# EAGLE board EEPROM Programmer (EAGLE 7.6.0)

Size 56.03 x 56.03 mm. Coordinates in mm from the lower left corner, seen from the top.
Outline: 4.03,0.03 0.03,0.03 0.03,3.03
Outline: 24.03,0.03 33.03,0.03
Outline: 52.03,0.03 40.03,0.03
Outline: 0.03,42.03 0.03,52.03
Outline: 0.03,3.03 arc90 3.03,0.03 4.03,0.03
Outline: 4.03,0.03 33.03,0.03
Outline: 52.03,0.03 arc90 56.03,3.03 56.03,52.03 arc90 52.03,56.03 3.03,56.03 arc90 0.03,52.03
Outline: 52.03,0.03 33.03,0.03
Outline: 0.03,3.03 0.03,52.03
Copper layers (1*16): Top 0.035mm / dielectric 1.5mm / Bottom 0.035mm
Design rules "default": minimum track width 10mil, minimum drill 24mil, track to track 8mil, track to pad 8mil, pad to pad 8mil, via to via 8mil, smd to smd 8mil, copper to edge 40mil, drill to drill 8mil, minimum pad ring 10mil, minimum via ring 8mil, stop-mask expansion 4mil, vias tented up to drill 0mil, thermal gap 10mil

## Footprints (pad centres in the part's own frame; a part is rotated, then mirrored left to right if it is on the bottom)
DIL24-6 = drill 0.813 long: 1 -13.97,-7.62; 2 -11.43,-7.62; 3 -8.89,-7.62; 4 -6.35,-7.62; 5 -3.81,-7.62; 6 -1.27,-7.62; 7 1.27,-7.62; 8 3.81,-7.62; 9 6.35,-7.62; 10 8.89,-7.62; 11 11.43,-7.62; 12 13.97,-7.62; 13 13.97,7.62; 14 11.43,7.62; 15 8.89,7.62; 16 6.35,7.62; 17 3.81,7.62; 18 1.27,7.62; 19 -1.27,7.62; 20 -3.81,7.62; 21 -6.35,7.62; 22 -8.89,7.62; 23 -11.43,7.62; 24 -13.97,7.62
1X02 = drill 1.016 long: 1 -1.27,0; 2 1.27,0
1X10-BIG = drill 1.016 pad 1.778 octagon: 1 -11.43,0; 2 -8.89,0; 3 -6.35,0; 4 -3.81,0; 5 -1.27,0; 6 1.27,0; 7 3.81,0; 8 6.35,0; 9 8.89,0; 10 11.43,0
1X15 = drill 1.016 long: 1 -17.78,0; 2 -15.24,0; 3 -12.7,0; 4 -10.16,0; 5 -7.62,0; 6 -5.08,0; 7 -2.54,0; 8 0,0; 9 2.54,0; 10 5.08,0; 11 7.62,0; 12 10.16,0; 13 12.7,0; 14 15.24,0; 15 17.78,0
1206 = smd 1.6 x 1.803: A -1.422,0; C 1.422,0
R1206 = smd 1.6 x 1.803: 1 -1.422,0; 2 1.422,0
DIL16 = drill 0.813 long: 1 -8.89,-3.81; 2 -6.35,-3.81; 3 -3.81,-3.81; 4 -1.27,-3.81; 5 1.27,-3.81; 6 3.81,-3.81; 7 6.35,-3.81; 8 8.89,-3.81; 9 8.89,3.81; 10 6.35,3.81; 11 3.81,3.81; 12 1.27,3.81; 13 -1.27,3.81; 14 -3.81,3.81; 15 -6.35,3.81; 16 -8.89,3.81

## Placement (x,y rotation side)
28C16AP  28C16AP  [DIL24-6]  38.53,15.53 0 top
CAP  [1X02]  9.03,53.03 0 top
EEPROM_ADDR  PINHD-1X10  [1X10-BIG]  39.53,54.33 180 top
EEPROM_DATA  PINHD-1X10  [1X10-BIG]  40.63,2.03 0 top
JP_D13_VCC_GND  [1X15]  17.03,20.53 270 top
JP_DC11_DC10  [1X15]  2.03,20.53 270 top
POWER_LED  [1206]  14.03,48.03 0 top
R_POWER_LED  [R1206]  24.03,46.03 180 top
R_WRITE_EN_LED  [R1206]  24.53,42.03 180 top
R_WRITE_EN_PU  [R1206]  24.53,38.03 180 top
SR_0  74HC595N  [DIL16]  43.03,42.03 180 top
SR_1  74HC595N  [DIL16]  43.03,31.03 180 top
WRITE_EN_LED  [1206]  52.03,48.53 0 top

## Library data of the parts
28C16AP = microchip; MPN: CAT28C16ALI-12; OC_FARNELL: 1718292; OC_NEWARK: 06R0648
CAP = pinhead
EEPROM_ADDR EEPROM_DATA JP_D13_VCC_GND JP_DC11_DC10 POWER_LED R_POWER_LED R_WRITE_EN_LED R_WRITE_EN_PU WRITE_EN_LED = adafruit
SR_0 SR_1 = 74xx-eu

## Nets
A0: JP_D13_VCC_GND.12
A1: JP_D13_VCC_GND.11
A2: JP_D13_VCC_GND.10
A3: JP_D13_VCC_GND.9
A4: JP_D13_VCC_GND.8
A5: JP_D13_VCC_GND.7
A6: JP_D13_VCC_GND.6
A7: JP_D13_VCC_GND.5
EEPROM_A0: 28C16AP.8 EEPROM_ADDR.1 SR_0.15
EEPROM_A1: 28C16AP.7 EEPROM_ADDR.2 SR_0.1
EEPROM_A2: 28C16AP.6 EEPROM_ADDR.3 SR_0.2
EEPROM_A3: 28C16AP.5 EEPROM_ADDR.4 SR_0.3
EEPROM_A4: 28C16AP.4 EEPROM_ADDR.5 SR_0.4
EEPROM_A5: 28C16AP.3 EEPROM_ADDR.6 SR_0.5
EEPROM_A6: 28C16AP.2 EEPROM_ADDR.7 SR_0.6
EEPROM_A7: 28C16AP.1 EEPROM_ADDR.8 SR_0.7
EEPROM_A8: 28C16AP.23 SR_1.15
EEPROM_A9: 28C16AP.22 SR_1.1
EEPROM_A10: 28C16AP.19 SR_1.2
EEPROM_D0: 28C16AP.9 EEPROM_DATA.1 JP_DC11_DC10.8
EEPROM_D1: 28C16AP.10 EEPROM_DATA.2 JP_DC11_DC10.9
EEPROM_D2: 28C16AP.11 EEPROM_DATA.3 JP_DC11_DC10.10
EEPROM_D3: 28C16AP.13 EEPROM_DATA.4 JP_DC11_DC10.11
EEPROM_D4: 28C16AP.14 EEPROM_DATA.5 JP_DC11_DC10.12
EEPROM_D5: 28C16AP.15 EEPROM_DATA.6 JP_DC11_DC10.13
EEPROM_D6: 28C16AP.16 EEPROM_DATA.7 JP_DC11_DC10.14
EEPROM_D7: 28C16AP.17 EEPROM_DATA.8 JP_DC11_DC10.15
EEPROM_OUT_EN: 28C16AP.20 SR_1.7 WRITE_EN_LED.A
EEPROM_WRITE_EN: 28C16AP.21 JP_D13_VCC_GND.15 R_WRITE_EN_PU.2
GND: 28C16AP.12 28C16AP.18 CAP.2 EEPROM_ADDR.10 EEPROM_DATA.10 JP_D13_VCC_GND.2 R_POWER_LED.2 R_WRITE_EN_LED.2 SR_0.8 SR_0.13 SR_1.8 SR_1.13
N$1: POWER_LED.C R_POWER_LED.1
N$2: R_WRITE_EN_LED.1 WRITE_EN_LED.C
N$4: SR_0.9 SR_1.14
SR_DATA: JP_DC11_DC10.5 SR_0.14
SR_LATCH: JP_DC11_DC10.7 SR_0.12 SR_1.12
SR_SCK: JP_DC11_DC10.6 SR_0.11 SR_1.11
VCC: 28C16AP.24 CAP.1 EEPROM_ADDR.9 EEPROM_DATA.9 JP_D13_VCC_GND.4 POWER_LED.A R_WRITE_EN_PU.1 SR_0.10 SR_0.16 SR_1.10 SR_1.16

## Tracks (layer width: path | path; a pad name or v marks a point on that pad's centre or on a via)
EEPROM_A0  (2 unrouted)
EEPROM_A1  (2 unrouted)
EEPROM_A2  (2 unrouted)
EEPROM_A3  (2 unrouted)
EEPROM_A4  (2 unrouted)
EEPROM_A5  (2 unrouted)
EEPROM_A6  (2 unrouted)
EEPROM_A7  (2 unrouted)
EEPROM_A8  (1 unrouted)
EEPROM_A9  (1 unrouted)
EEPROM_A10  (1 unrouted)
EEPROM_D0  (2 unrouted)
EEPROM_D1  (2 unrouted)
EEPROM_D2  (2 unrouted)
EEPROM_D3  (2 unrouted)
EEPROM_D4  (2 unrouted)
EEPROM_D5  (2 unrouted)
EEPROM_D6  (2 unrouted)
EEPROM_D7  (2 unrouted)
EEPROM_OUT_EN  (2 unrouted)
EEPROM_WRITE_EN  (2 unrouted)
GND  (11 unrouted)
N$1  (1 unrouted)
N$2  (1 unrouted)
N$4  (1 unrouted)
SR_DATA  (1 unrouted)
SR_LATCH  (2 unrouted)
SR_SCK  (2 unrouted)
VCC  (10 unrouted)

## Text on the board
tNames: + | A7 | A6 | A5 | A4 | A3 | A2 | A1 | A0 | GND | VCC | + | + | AT28C16 / PROGRAMMER | GND | VCC | D2 | D10 | D0 | D1 | D2 | D3 | D4 | D5 | D6 | D7 | VCC | GND | D12 | D13
bNames: MadeInTheUSB.net | PCBv1 - 2017.08